# Altium PCB MotorShield.PcbDoc
Units mil, origin at the board's own origin, x right, y up, seen from the top; angles counter-clockwise.
Board outline 1185 x 1235 mil, 2 copper layers (Top Layer, Bottom Layer); 18 components, 23 nets, 89 pads, 0 vias.
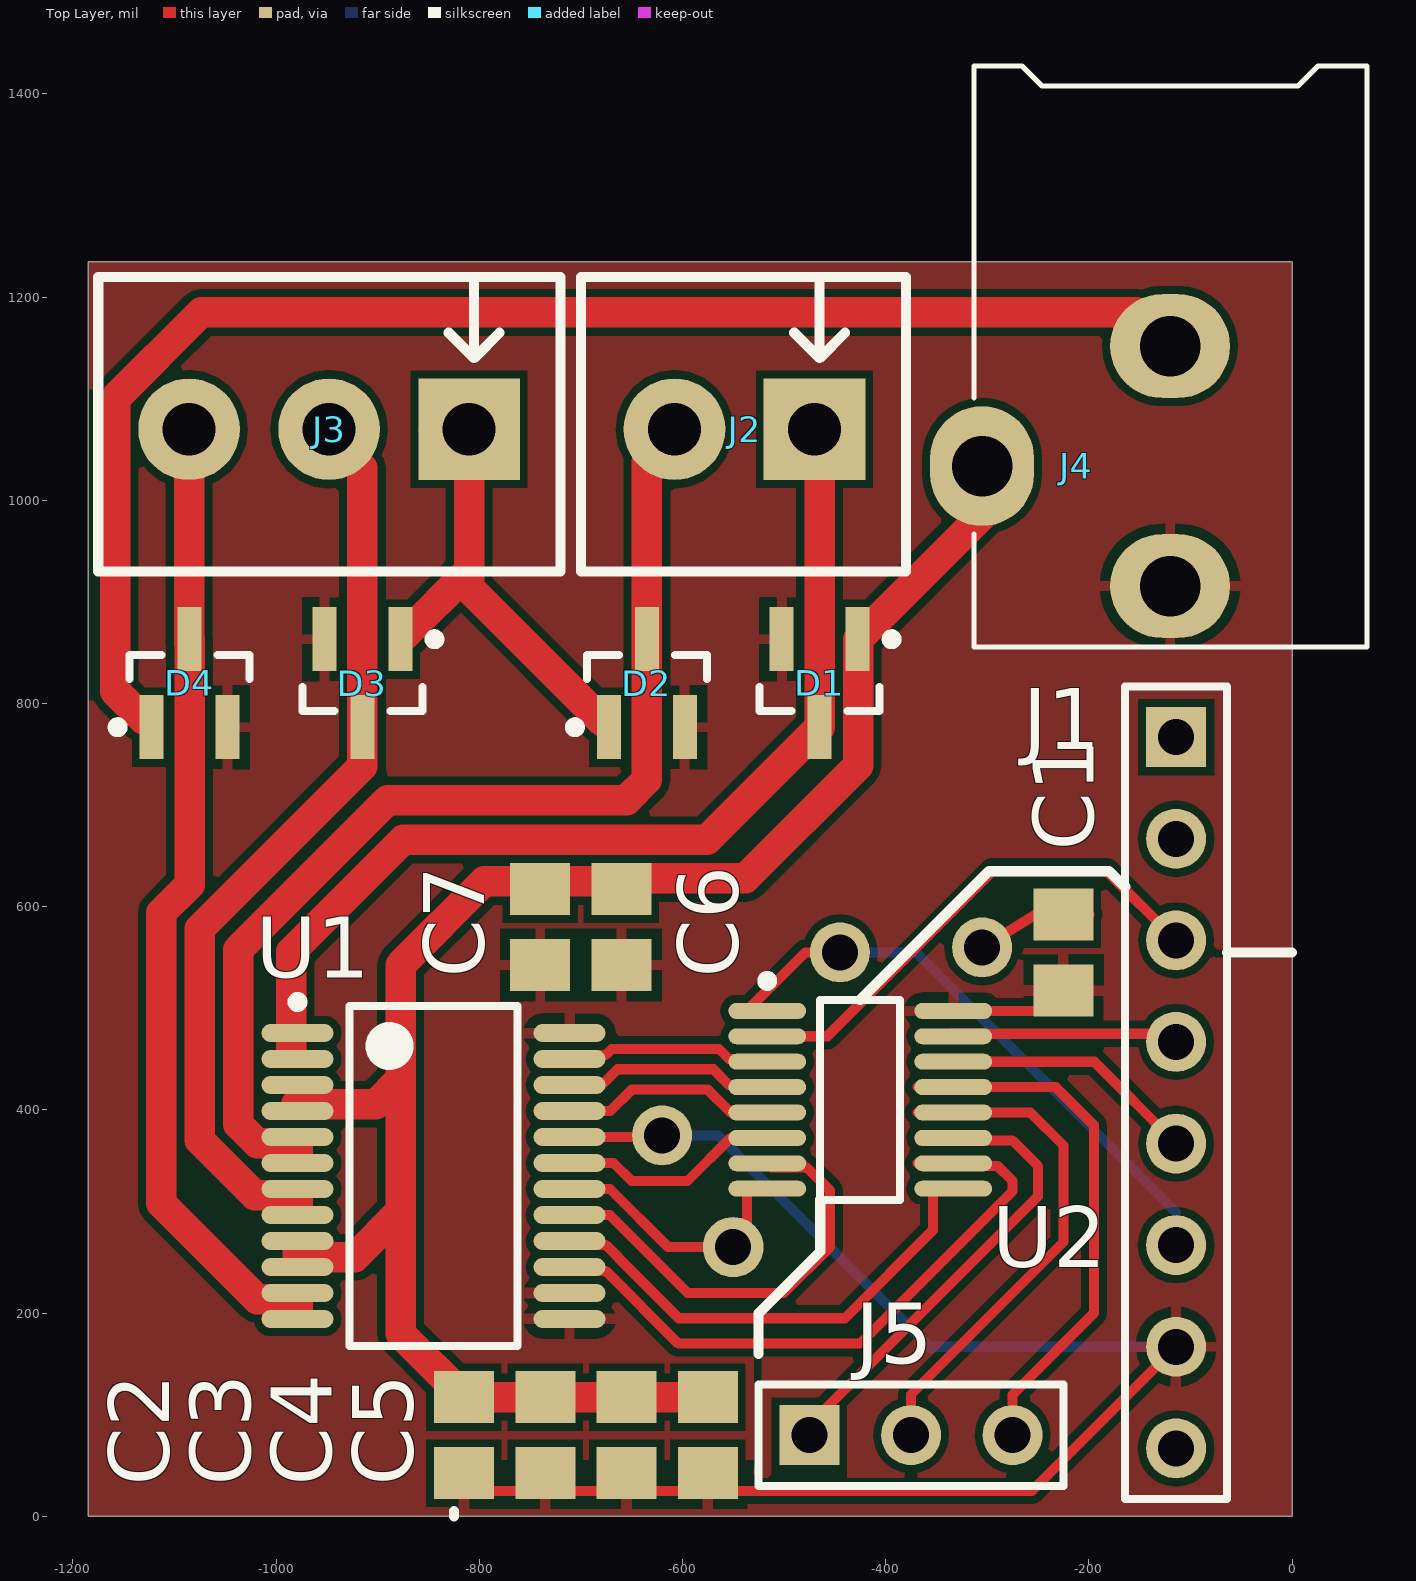
[diagram p0: Top Layer view]
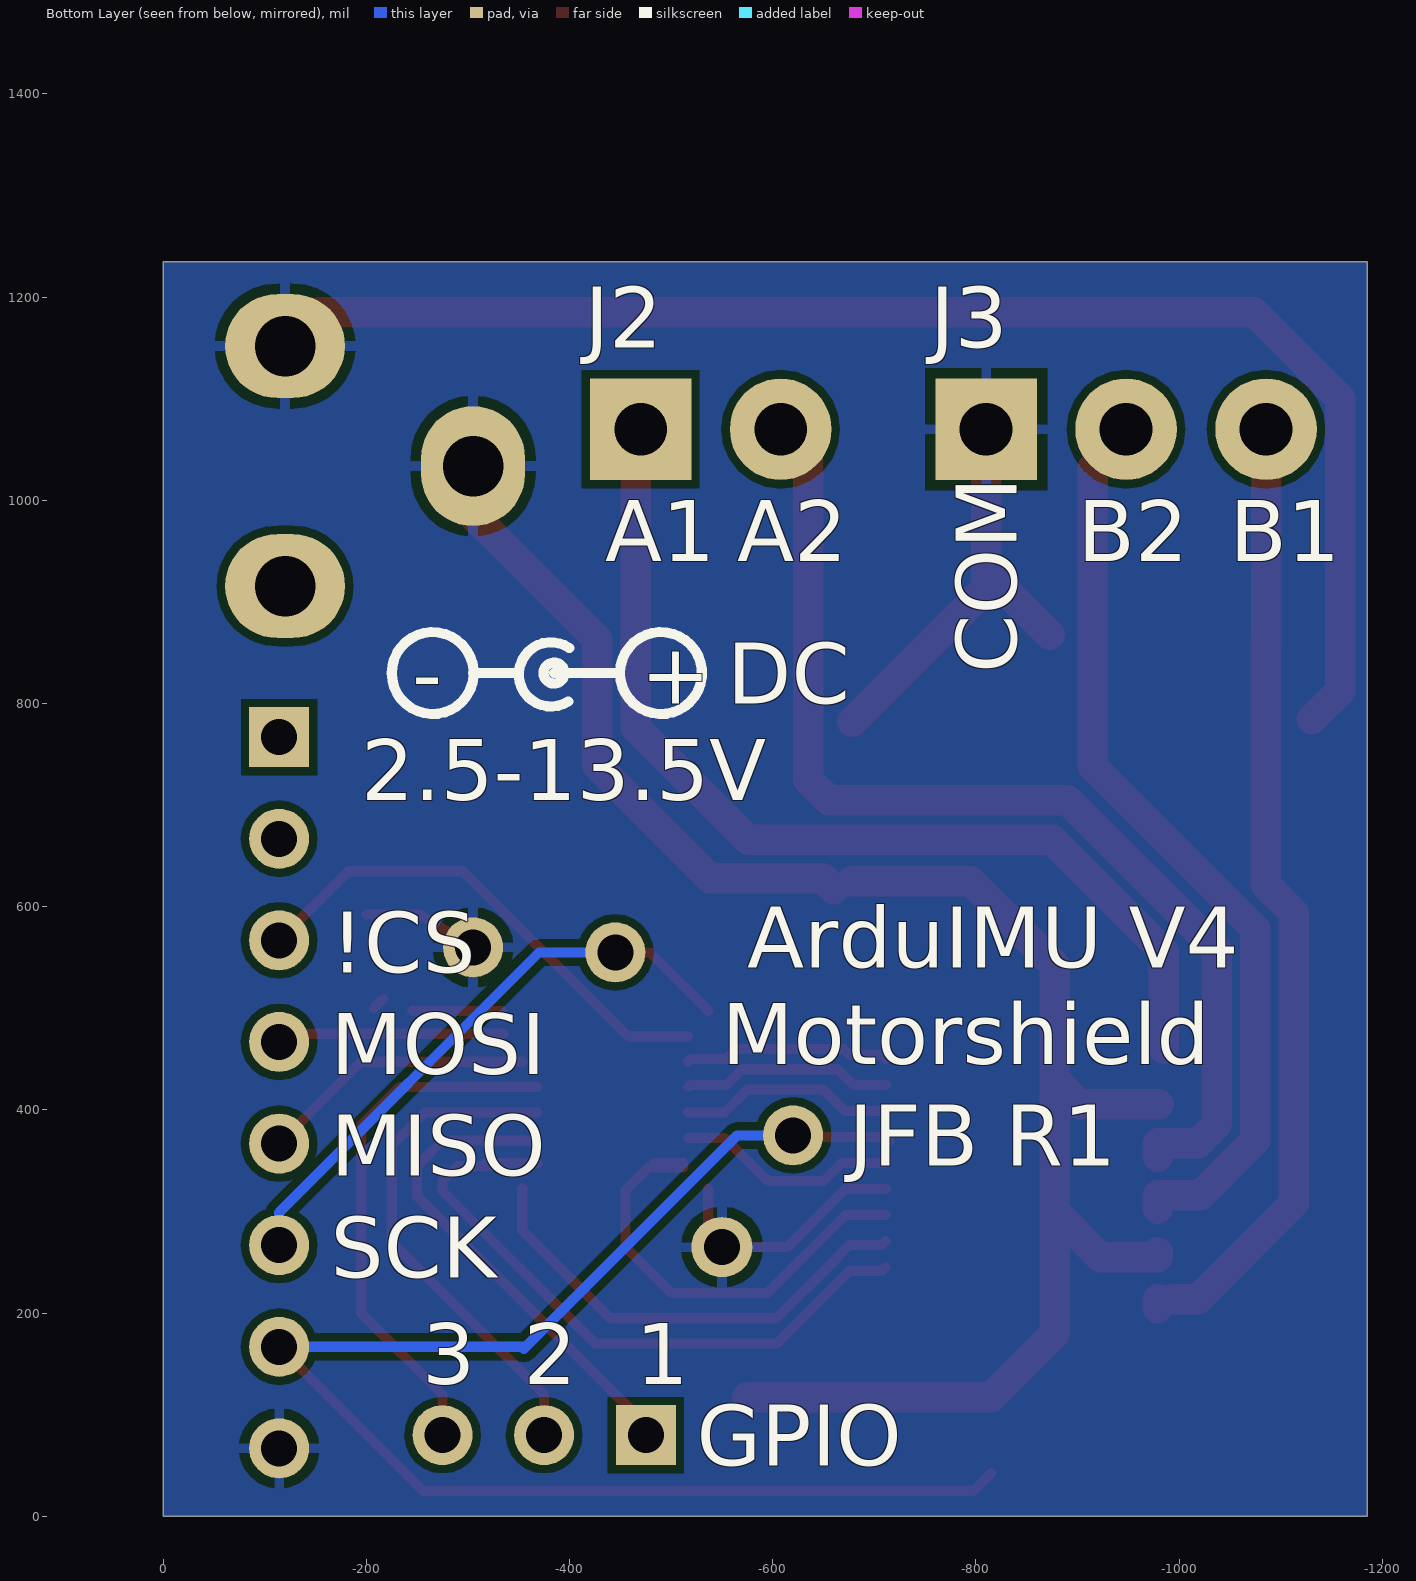
[diagram p1: Bottom Layer view, seen from below]

## Layer stack, top to bottom
Top Layer: signal copper 1.4
Dielectric: dielectric 12.6, FR-4, Dk 4.8
Bottom Layer: signal copper 1.4

## Board outline
-1185,0 -1185,1235 0,1235 0,0

## Design rules (kind name [scope] priority, off if disabled: settings)
Clearance [All] p1: gap=7.87
PolygonConnect [All] p1: connectstyle=Relief reliefconductorwidth=10 reliefentries=4 polygonreliefangle="90 Angle" airgapwidth=10
RoutingVias [All] p1: holewidth=28 width=50 viastyle="Through Hole" minholewidth=28 minwidth=50 maxholewidth=28 maxwidth=50
SolderMaskExpansion [All] p1: expansion=4
Width [All] p1: maxlimit=30 minlimit=10 preferedwidth=10
28 further rules are at their usual default settings.

## Components (designator, comment, footprint, x,y, rotation, side; value= is the part's Value field where it differs from the comment)
C1 "Cap" 6-0805 -225,555 r270 top
C2 "Cap" 6-0805 -815,80 r270 top
C3 "Cap" 6-0805 -735,80 r270 top
C4 "Cap" 6-0805 -655,80 r270 top
C5 "Cap" 6-0805 -575,80 r270 top
C6 "Cap" 6-0805 -660,580 r270 top
C7 "Cap" 6-0805 -740,580 r270 top
D1 "BAT54S" SOT23_M -465,820 r270 top
D2 "BAT54S" SOT23_M -635,820 r90 top
D3 "BAT54S" SOT23_M -915,820 r270 top
D4 "BAT54S" SOT23_M -1085,820 r90 top
J1 "ArduIMU_Connector" HDR1X8 -114.17,766.93 r270 top
J2 "2P_TBlock" 2P_TBlock -470,1070 r270 top
J3 "3P_TBlock" 3P_TBlock -810,1070 r270 top
J4 "CONN_PWR_JACK_2.1x5.5mm" CONN_PWR_JACK_2.1x5.5mm -120,1455 r0 top
J5 "GPIO" HDR1X3 -475,80 r0 top
U1 "TB6612FNG" SSOP-SS24_L -845,335 r0 top
U2 "MAX6966" QSOP-QR16_L -425,410 r0 top

## Footprints (in the part's own frame and the unit in brackets; to place one, negate y for a bottom-side part, rotate by r counter-clockwise, add the part's x,y. Pads: shape width x height; smd on the part's side, far side on the other; paste and mask are expansions set on the pad)
2P_TBlock [mil] "2 Pin Terminal Block (3.5mm pitch)"
  rect 100x100 hole 52: 1(0,0)
  round 100 hole 52: 2(0,-137.8)
  silkscreen extent -150,-230 140,90
3P_TBlock [mil] "3 Pin Terminal Block (3.5mm pitch)"
  rect 100x100 hole 52: 1(0,0)
  round 100 hole 52: 2(0,-137.8) 3(0,-275.59)
  silkscreen extent -150,-365 140,90
6-0805 [mm] "Chip Resistor; Body 2 x 1.2 mm (LxW typ)"
  rect 1.3x1.5 smd: 1(-0.95,0) 2(0.95,0)
CONN_PWR_JACK_2.1x5.5mm [mm] "Power Connector, 2.1mm ID, 5.5mm OD"
  oval 3x2.6 hole 1.511: 1(0,-13.7) 2(0,-7.7)
  oval 2.6x3 hole 1.511: 3(-4.7,-10.7)
  silkscreen extent -4.9,-15.22 4.92,-0.7, body extent -4.9,-14.1 4.5,0, height 11
HDR1X3 [mm] "Connector; Header; 3 Position"
  rect 1.5x1.5 hole 0.9: 1(0,0)
  round 1.5 hole 0.9: 2(2.54,0) 3(5.08,0)
  silkscreen extent -1.27,-1.27 6.35,1.27
HDR1X8 [mm] "Connector; Header; 8 Position"
  rect 1.5x1.5 hole 0.9: 1(0,0)
  round 1.5 hole 0.9: 2(2.54,0) 3(5.08,0) 4(7.62,0) 5(10.16,0) 6(12.7,0) 7(15.24,0) 8(17.78,0)
  silkscreen extent -1.27,-1.27 19.05,1.27
QSOP-QR16_L [mm] "SOP, 16-Leads, Body 4.9x3.9mm, Pitch 0.635mm, IPC High Density"
  oval 1.95x0.4 smd: 1(-2.325,2.222) 2(-2.325,1.587) 3(-2.325,0.953) 4(-2.325,0.318) 5(-2.325,-0.318) 6(-2.325,-0.953) 7(-2.325,-1.587) 8(-2.325,-2.222) 9(2.325,-2.222) 10(2.325,-1.587) 11(2.325,-0.953) 12(2.325,-0.318) 13(2.325,0.318) 14(2.325,0.953) 15(2.325,1.587) 16(2.325,2.222)
  silkscreen extent -2.45,-2.5 1,3.1, body extent -1.99,-2.5 1.99,2.5, height 1.76
SOT23_M [mm] "SOT23, 3-Leads, Body 2.9x1.3mm, Pitch 0.95mm, Lead Span 2.3mm, IPC Low Density"
  rect 1.6x0.6 smd: 1(-1.1,0.95) 2(-1.1,-0.95) 3(1.1,0)
  silkscreen extent -1.22,-1.5 0.7,1.93, body extent -0.7,-1.5 0.7,1.5, height 1.1
SSOP-SS24_L [mm] "SOP, 24-Leads, Body 8.2x5.3mm, Pitch 0.65mm, IPC High Density"
  oval 1.8x0.45 smd: 1(-3.4,3.575) 2(-3.4,2.925) 3(-3.4,2.275) 4(-3.4,1.625) 5(-3.4,0.975) 6(-3.4,0.325) 7(-3.4,-0.325) 8(-3.4,-0.975) 9(-3.4,-1.625) 10(-3.4,-2.275) 11(-3.4,-2.925) 12(-3.4,-3.575) 13(3.4,-3.575) 14(3.4,-2.925) 15(3.4,-2.275) 16(3.4,-1.625) 17(3.4,-0.975) 18(3.4,-0.325) 19(3.4,0.325) 20(3.4,0.975) 21(3.4,1.625) 22(3.4,2.275) 23(3.4,2.925) 24(3.4,3.575)
  silkscreen extent -3.52,-4.25 2.1,4.47, body extent -2.7,-4.25 2.7,4.25, height 2

## Part data
C1 C2 C3 C4 C5 C6 C7: "Capacitor"
D1 D2 D3 D4: "Schottky Barrier Double Diode"
J1: library part "Header 8", "Header, 8-Pin"
J2: "2 Pin Terminal Block"
J3: "3 Pin Terminal Block"
J4: "Power Connector, THT, 2.1mm ID, 5.5mm OD"
J5: library part "Header 3", "Header, 3-Pin"
U1: "Driver IC for Dual DC motor"
U2: "10-Port Constant-Current LED Drivers and I/O  Expanders with PWM Intensity Control"

## Free pads (board coordinates)
  round 59.05 hole 35.43: 6(-445,555) 6(-305,560) 7(-620,375)
  oval 60x59.05 hole 35.43: 8(-550,265)

## Nets (pads, with @x,y where several pads share a name; then routed paths per layer and width w, separated by ;. In a path a pad name is that pad's centre, name@x,y a point inside that pad or via, vN(x,y) a via of type N, cw(c..) or ccw(c..) an arc to the next point about the centre after c; other vN are vias at no path point)
3V3: C1.2 C2.2 C3.2 C4.2 C5.2 J1.7 pad.7 U1.20 U2.16 | length 1557.1
  Top Layer w10: C2.2 -797.4,25 -256.1,25 J1.7 ; U1.20@-715,369.53 U1.20 pad.7@-621.61,373.39 ; U2.16 C1.2@-245.1,497.5 ; C1.2@-216.73,509.33 C1.2@-207.4,500
  Bottom Layer w10: pad.7 -565,375 -355,165 -353.07,166.93 J1.7
A_IN1: U1.22 U2.4 | length 208.2
  Top Layer w10: U1.22 -679.42,424.57 -663.99,440 -569.72,440 -554.29,424.57 -518.6,424.57 U2.4
A_IN2: U1.21 U2.5 | length 212.6
  Top Layer w10: U1.21 -671.02,398.98 -650,420 -575,420 -552.5,397.5 U2.5
AIN1: J1.2
B_IN1: U1.17 U2.7 | length 458.7
  Top Layer w10: U1.17 -671.61,296.61 -595,220 -500,220 -455,265 -455,320.82 -477.43,343.25 U2.7@-512.28,343.25 ; U2.7@-512.28,347.5 U2.7@-482.5,347.5
B_IN2: U1.16 U2.9 | length 466.2
  Top Layer w10: U1.16 -707.28,267.17 -675.57,267.17 -662.83,254.43 -662.83,254.12 -603.71,195 -440,195 -353.46,281.54 U2.9@-353.46,322.5
C\S\: J1.3 U2.2 | length 497.9
  Top Layer w10: U2.2 -457.5,472.5 -295,635 -182.24,635 J1.3
COMMON: C1.1 C2.1 C3.1 C4.1 C5.1 C6.1 C7.1 D1.1 D2.1 D3.1 D4.1 J1.8 J3.1 J4.2 J4.3 pad.6@-305,560 pad.8 U1.3 U1.4 U1.9 U1.10 U1.18 U2.8 | length 4050.1
  Top Layer w10: U1.18 -671.31,322.2 -614.11,265 pad.8 -536.54,278.46 U2.8@-536.54,322.5 ; pad.6@-305,560 -252.4,592.4 C1.1 C1.1@-199.61,592.4 ; J1.8 J1.8@-114.17,82.13
  Top Layer w30: D4.1@-1130.59,784.41 -1158.46,812.28 -1158.46,1100.19 -1073.65,1185 -153.15,1185 J4.2 ; U1.4@-980,405.59 -901.81,405.59 -877.4,430 ; -978.86,260 -978.86,255 -922.4,255 -877.4,300 ; D3.1@-872.72,867.72 -810,930.43 ; J3.1@-844.74,1070 J3.1 -810,930.43 ; D2.1@-678.09,781.91 -810,913.82 -810,930.43 ; C6.1@-677.4,625 -795,625 -877.4,542.6 -877.4,430 ; C6.1 -649.41,627.99 -538.04,627.99 -427.13,738.91 -427.13,863.31 -305.04,985.39 J4.3 ; C5.1 C4.1 C3.1 C2.1 -877.4,179.8 -877.4,300 ; -877.4,300 -877.4,430
GPIO_1: J5.1 U2.11 | length 477.2
  Top Layer w10: J5.1@-476.88,88.12 -250,315 -250,345 -275,370 U2.11@-365.96,370
GPIO_2: J5.2 U2.12 | length 474.1
  Top Layer w10: -375,110 -375,120 -225,270 -225,365 -257.5,397.5 U2.12@-368.46,397.5
GPIO_3: J5.3 U2.13 | length 527.1
  Top Layer w10: U2.13@-368.46,422.5 -232.5,422.5 -195,385 -195,200 -275,120 J5.3
MISO: J1.5 U2.14 | length 272.7
  Top Layer w10: U2.14@-353.46,447.5 -194.74,447.5 J1.5
MOSI: J1.4 U2.15 | length 224.2
  Top Layer w10: U2.15@-335,475 -122.24,475 J1.4
NetD1_3: D1.3 J2.1 U1.1 U1.2 | length 990.6
  Top Layer w30: -985,460 -985,555.75 -874.88,665.87 -575.83,665.87 D1.3 J2.1@-465,1060
NetD2_3: D2.3 J2.2 U1.5 U1.6 | length 1035.5
  Top Layer w30: U1.6@-978.86,353.94 -978.86,367.24 -1018.58,367.24 -1037.17,385.83 -1037.17,557.83 -890,705 -655,705 -635,725 J2.2@-635,1037.8
NetD3_3: D3.3 J3.2 U1.7 U1.8 | length 906.6
  Top Layer w30: U1.8@-978.86,302.76 -978.86,316.06 -1020.96,316.06 -1075.04,370.14 -1075.04,578.27 -915,738.31 -915,863.31 -915,1032.2 J3.2@-947.8,1065
NetD4_3: D4.3 J3.3 U1.11 U1.12 | length 939.9
  Top Layer w30: D4.3@-1085.59,858.9 J3.3@-1085.59,1065 ; D4.3 -1085,621.87 -1112.91,593.96 -1112.91,308.04 -1018.58,213.7 U1.11@-993.7,213.7 ; -978.86,205 U1.11@-978.86,213.7
PWM_A: U1.23 U2.3 | length 203.9
  Top Layer w10: U1.23 -707.28,454.02 -675.57,454.02 -669.58,460 -564.04,460 -554.19,450.16 -519.19,450.16 U2.3
PWM_B: U1.19 U2.6 | length 219.6
  Top Layer w10: U1.19 -667.8,347.8 -650,330 -595,330 -552.5,372.5 U2.6
RST1: J1.1
S\T\B\Y\: U1.15 U2.10 | length 651.9
  Top Layer w10: U1.15@-710.71,245 -707.28,241.57 -675.57,241.57 -603.99,170 -425.28,170 -275,320.28 -275,330 -290,345 U2.10@-330.96,345 ; U2.10@-368.46,347.5 U2.10 U2.10@-317.5,347.5
SCK: J1.6 pad.6@-445,555 U2.1 | length 584.4
  Top Layer w10: U2.1@-536.54,497.5 -479.04,555 pad.6@-445,555
  Bottom Layer w10: pad.6@-445,555 -370,555 -114.17,299.17 J1.6
VMOTOR: C6.2 C7.2 D1.2 D2.2 D3.2 D4.2 J4.1 U1.13 U1.14 U1.24

## Polygon pours and split planes (outlines as drawn)
COMMON on Bottom Layer "Top Layer-No Net" (solid, pour order 8): -1185,1235 0,1235 0,0 -1185,0
3V3 on Top Layer "Top Layer-No Net" (solid, pour order 16): 0,558.03 0,0 -830,0 -830,45 -532.4,45 -530,42.6 -530,459.04 -516.54,472.5 -457.5,472.5 -295,635 -182.24,635 -114.17,566.93 -105.27,558.03 0,558.03
VMOTOR on Top Layer "Top Layer-No Net" (solid, pour order 14): -1185,0 -1185,1235 0,1235 0,550 -100,550 -100,552.76 -182.24,635 -295,635 -457.5,472.5 -515,472.5 -515,170 -525,160 -525,42.6 -815,42.6 -830,27.6 -830,0

## Silkscreen, mask and mechanical layers (free items; w line width, h text height)
Top Overlay:
  lines w10: -825,0 -825,5 ; -525,160 -525,200 -464.37,260.63 -464.37,311.57 ; -164.17,620 -165,620 -180,635 -293.43,635 -298.43,635 -425,508.43 ; -64.17,555 0,555 ; -425,508.43 -425,508.43
Bottom Overlay:
  circle w10: c-265.31,830 r40.31
  circle w10: c-384.69,830 r10.31
  circle w10: c-490,830 r40.31
  lines w10: -449.69,830 -384.69,830 ; -399.74,854.62 cw(c-381.64,828.72) -398.66,802.1 ; -345,830 -305,830
  text "J3" at -755,1150 h60
  text "J2" at -415,1150 h60
  text "B1" at -1050,940 h60
  text "B2" at -900,940 h60
  text "A2" at -565,940 h60
  text "A1" at -435,940 h60
  text "COM" at -840,830 h60 r270
  text "DC" at -555,800 h60
  text "+" at -470,800 h60
  text "-" at -245,800 h60
  text "2.5-13.5V" at -195,705 h60
  text "ArduIMU V4" at -575,540 h60
  text "!CS" at -165,535 h60
  text "Motorshield" at -550,445 h60
  text "MOSI" at -165,435 h60
  text "JFB R1" at -675,345 h60
  text "MISO" at -165,335 h60
  text "SCK" at -165,235 h60
  text "1" at -465,130 h60
  text "2" at -355,130 h60
  text "3" at -255,130 h60
  text "GPIO" at -525,50 h60